# Altium PCB ALU_AND.PcbDoc
Units mil, origin at the board's own origin, x right, y up, seen from the top; angles counter-clockwise.
Board outline 3500 x 2500 mil, 2 copper layers (Top Layer, Bottom Layer); 9 components, 76 nets, 168 pads, 0 vias.
Unrouted connection lines stored in the file: 84.
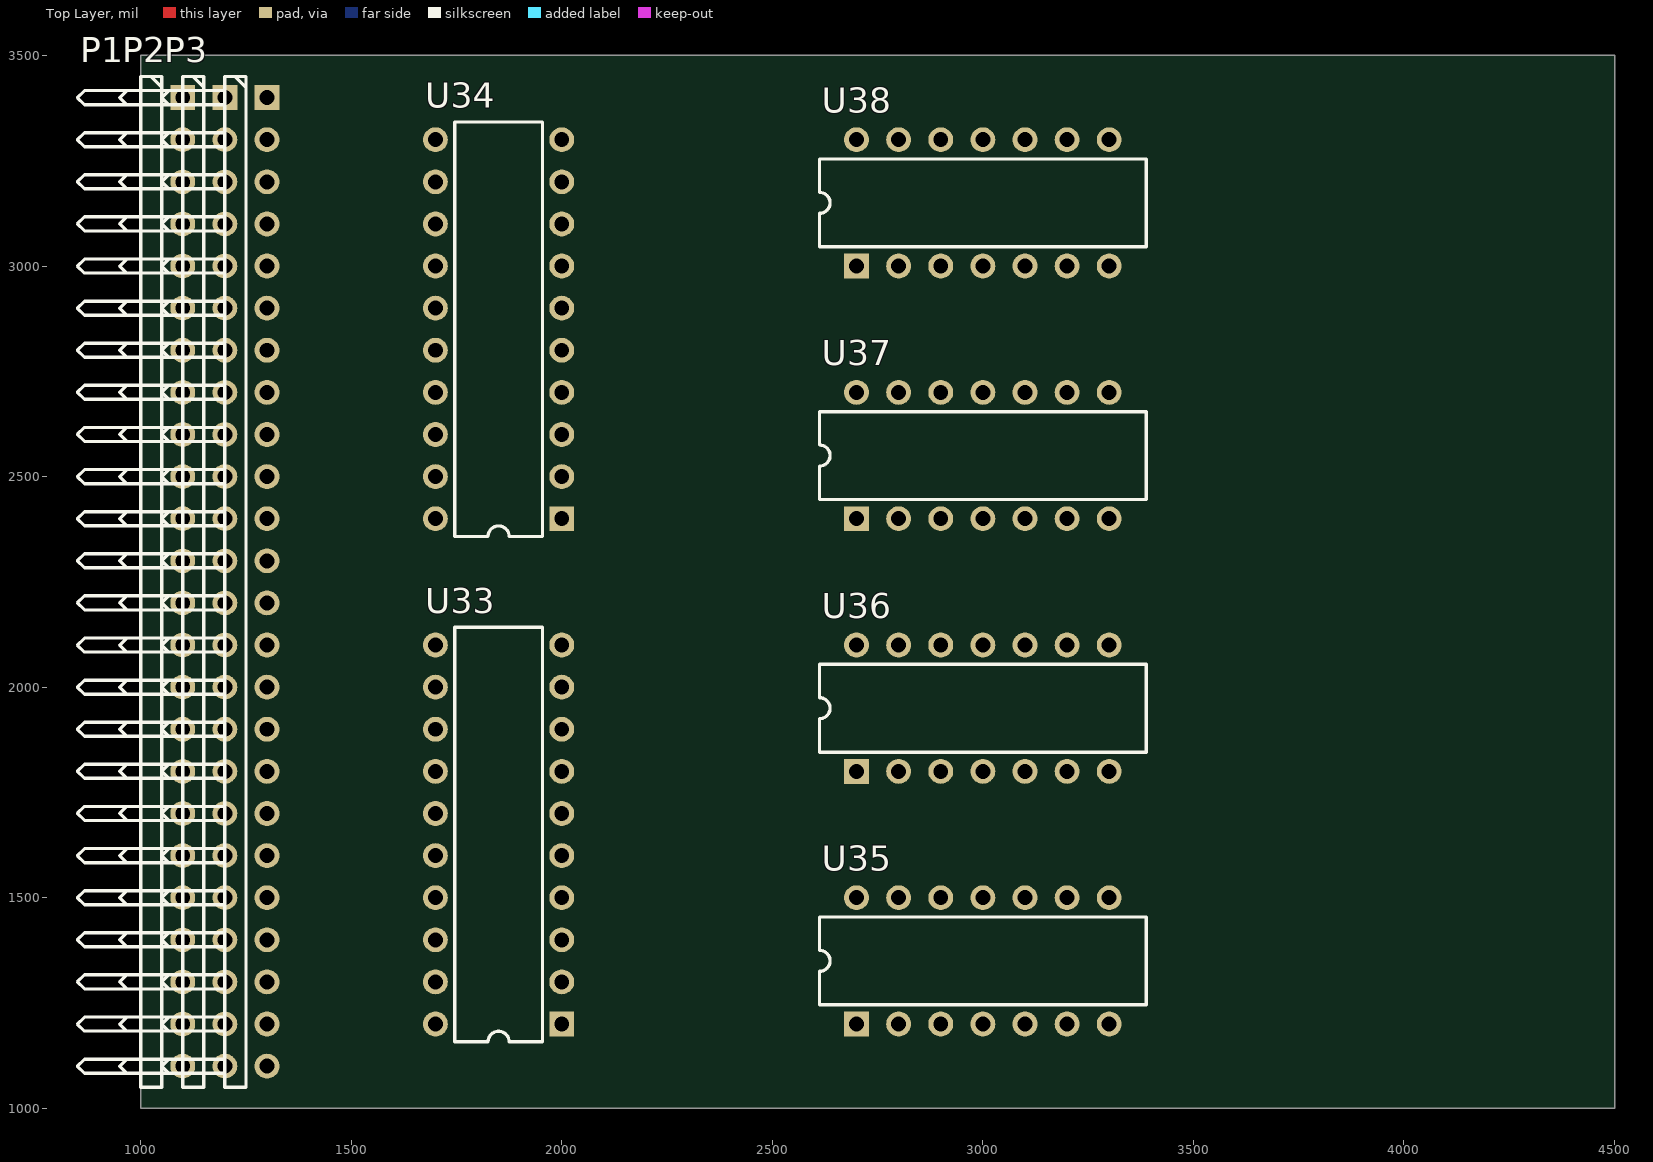
[diagram p0: Top Layer view]
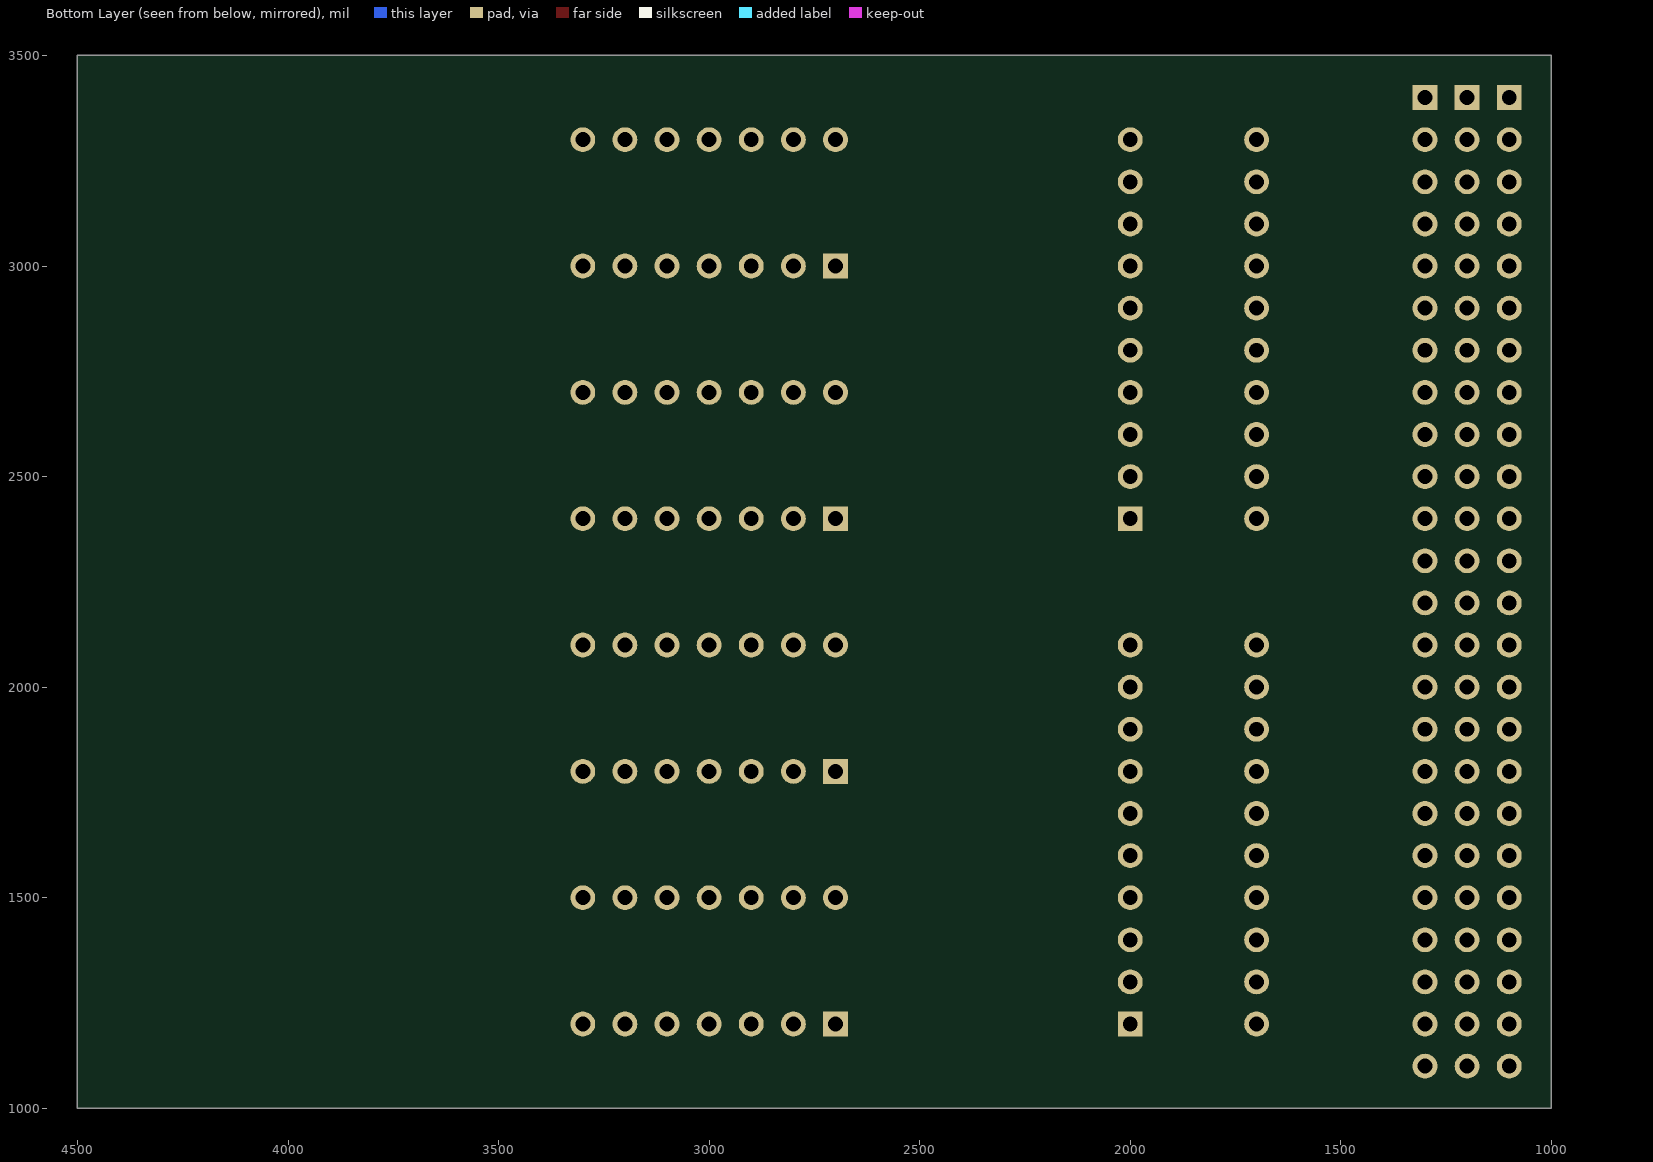
[diagram p1: Bottom Layer view, seen from below]

## Layer stack, top to bottom
Top Solder: solder mask 0.4, Solder Resist, Dk 3.5
Top Layer: signal copper 1.4
Dielectric 1: dielectric 12.6, FR-4, Dk 4.8
Bottom Layer: signal copper 1.4
Bottom Solder: solder mask 0.4, Solder Resist, Dk 3.5

## Board outline
1000,1000 4500,1000 4500,3500 1000,3500

## Design rules (kind name [scope] priority, off if disabled: settings)
Clearance [All] p1: gap=10 ignorepadtopadclearanceinfootprint=FALSE except(0: Arc-Hole Track-Hole SMDPad-Hole THPad-Hole Via-Hole Fill-Hole Poly-Hole Region-Hole Text-Hole)
PolygonConnect [All] p1: connectstyle=Relief reliefconductorwidth=10 reliefentries=4 polygonreliefangle="90 Angle" airgapwidth=10
RoutingVias [All] p1: holewidth=28 width=50 viastyle="Through Hole" minholewidth=28 minwidth=50 maxholewidth=28 maxwidth=50
SolderMaskExpansion [All] p1: expansion=4 istentingtop=FALSE
Width [All] p1: maxlimit=10 minlimit=10 preferedwidth=10
30 further rules are at their usual default settings.

## Classes and differential pairs
component class Connectors: P1 P2 P3
net class OUT_[15..0]: OUT_0 OUT_1 OUT_2 OUT_3 OUT_4 OUT_5 OUT_6 OUT_7 OUT_8 OUT_9 OUT_10 OUT_11 OUT_12 OUT_13 OUT_14 OUT_15
net class B_[15..0]: B_0 B_1 B_2 B_3 B_4 B_5 B_6 B_7 B_8 B_9 B_10 B_11 B_12 B_13 B_14 B_15
net class A_[15..0]: A_0 A_1 A_2 A_3 A_4 A_5 A_6 A_7 A_8 A_9 A_10 A_11 A_12 A_13 A_14 A_15
component class ALU_Adder: U33 U34 U35 U36 U37 U38

## Components (designator, comment, footprint, x,y, rotation, side; value= is the part's Value field where it differs from the comment)
P1 "Header 24H" HDR1X24H 1100,3400 r270 top
P2 "Header 24H" HDR1X24H 1200,3400 r270 top
P3 "Header 24H" HDR1X24H 1300,3400 r270 top
U33 "SN74LS245N" N020 1850,1650 r90 top
U34 "SN74LS245N" N020 1850,2850 r90 top
U35 "SN74LS08N" N014 3000,1350 r0 top
U36 "SN74LS08N" N014 3000,1950 r0 top
U37 "SN74LS08N" N014 3000,2550 r0 top
U38 "SN74LS08N" N014 3000,3150 r0 top

## Footprints (in the part's own frame and the unit in brackets; to place one, negate y for a bottom-side part, rotate by r counter-clockwise, add the part's x,y. Pads: shape width x height; smd on the part's side, far side on the other; paste and mask are expansions set on the pad)
HDR1X24H [mm] "Connector; Header; 24 Position; Right Angle"
  rect 1.5x1.5 hole 0.9: 1(0,0)
  round 1.5 hole 0.9: 2(2.54,0) 3(5.08,0) 4(7.62,0) 5(10.16,0) 6(12.7,0) 7(15.24,0) 8(17.78,0) 9(20.32,0) 10(22.86,0) 11(25.4,0) 12(27.94,0) 13(30.48,0) 14(33.02,0) 15(35.56,0) 16(38.1,0) 17(40.64,0) 18(43.18,0) 19(45.72,0) 20(48.26,0) 21(50.8,0) 22(53.34,0) 23(55.88,0) 24(58.42,0)
  silkscreen extent -1.27,-6.35 59.69,-1.27
N014 [mm] "DIP; 14 Leads; Row Spacing 7.62 mm; Pitch 2.54 mm"
  rect 1.5x1.5 hole 0.9: 1(-7.62,-3.81)
  round 1.5 hole 0.9: 2(-5.08,-3.81) 3(-2.54,-3.81) 4(0,-3.81) 5(2.54,-3.81) 6(5.08,-3.81) 7(7.62,-3.81) 8(7.62,3.81) 9(5.08,3.81) 10(2.54,3.81) 11(0,3.81) 12(-2.54,3.81) 13(-5.08,3.81) 14(-7.62,3.81)
  silkscreen extent -9.85,-2.65 9.85,2.65, body extent -9.15,-5.08 9.15,5.12, height 7.88
N020 [mm] "DIP; 20 Leads; Row Spacing 7.62 mm; Pitch 2.54 mm"
  rect 1.5x1.5 hole 0.9: 1(-11.43,-3.81)
  round 1.5 hole 0.9: 2(-8.89,-3.81) 3(-6.35,-3.81) 4(-3.81,-3.81) 5(-1.27,-3.81) 6(1.27,-3.81) 7(3.81,-3.81) 8(6.35,-3.81) 9(8.89,-3.81) 10(11.43,-3.81) 11(11.43,3.81) 12(8.89,3.81) 13(6.35,3.81) 14(3.81,3.81) 15(1.27,3.81) 16(-1.27,3.81) 17(-3.81,3.81) 18(-6.35,3.81) 19(-8.89,3.81) 20(-11.43,3.81)
  silkscreen extent -12.5,-2.65 12.5,2.65, body extent -13.08,-5.08 13.08,5.12, height 7.88

## Part data
P1 P2 P3: "Header, 24-Pin, Right Angle", LatestRevisionDate=17-Jul-2002, LatestRevisionNote="Re-released for DXP Platform.", Publisher="Altium Limited"
U33 U34: "Octal Bus Transceiver with 3-State Outputs", ComponentLink1Description="Manufacturer Link", ComponentLink1URL=http://www.ti.com/, ComponentLink2Description=Datasheet, ComponentLink2URL=http://www-s.ti.com/sc/ds/sn74ls245.pdf, DatasheetVersion=Mar-1988, LatestRevisionDate=04-Mar-2005, LatestRevisionNote="Stylized 3D Model Added.", PackageDescription="DIP; 20 Leads; Row Spacing 7.62 mm; Pitch 2.54 mm", PackageReference=N020, PackageVersion=Oct-1995, Published=8-Jun-2000, Publisher="Altium Limited"
U35 U36 U37 U38: "Quadruple 2-Input Positive-AND Gate", ComponentLink1Description="Manufacturer Link", ComponentLink1URL=http://www.ti.com/, ComponentLink2Description=Datasheet, ComponentLink2URL=http://www-s.ti.com/sc/ds/SN74LS08.pdf, DatasheetVersion=Mar-1988, LatestRevisionDate=04-Mar-2005, LatestRevisionNote="Stylized 3D Model Added.", PackageDescription="DIP; 14 Leads; Row Spacing 7.62 mm; Pitch 2.54 mm", PackageReference=N014, PackageVersion=Oct-1995, Published=8-Jun-2000, Publisher="Altium Limited"

## Nets (pads, with @x,y where several pads share a name; then routed paths per layer and width w, separated by ;. In a path a pad name is that pad's centre, name@x,y a point inside that pad or via, vN(x,y) a via of type N, cw(c..) or ccw(c..) an arc to the next point about the centre after c; other vN are vias at no path point)
A\D\D\_\O\U\T\: P1.2
A\N\D\_\O\U\T\: P1.4 U33.19 U34.19
A_0: P1.23 U35.1
A_1: P1.22 U35.4
A_2: P1.21 U35.9
A_3: P1.20 U35.12
A_4: P1.19 U36.1
A_5: P1.18 U36.4
A_6: P1.17 U36.9
A_7: P1.16 U36.12
A_8: P1.15 U37.1
A_9: P1.14 U37.4
A_10: P1.13 U37.9
A_11: P1.12 U37.12
A_12: P1.11 U38.1
A_13: P1.10 U38.4
A_14: P1.9 U38.9
A_15: P1.8 U38.12
B_0: P2.23 U35.2
B_1: P2.22 U35.5
B_2: P2.21 U35.10
B_3: P2.20 U35.13
B_4: P2.19 U36.2
B_5: P2.18 U36.5
B_6: P2.17 U36.10
B_7: P2.16 U36.13
B_8: P2.15 U37.2
B_9: P2.14 U37.5
B_10: P2.13 U37.10
B_11: P2.12 U37.13
B_12: P2.11 U38.2
B_13: P2.10 U38.5
B_14: P2.9 U38.10
B_15: P2.8 U38.13
CO: P3.2
GND: P1.24 P2.24 P3.24 U33.10 U34.10 U35.7 U36.7 U37.7 U38.7
LEFT: P2.2
O\R\_\O\U\T\: P1.5
OUT_0: P3.23 U33.18
OUT_1: P3.22 U33.17
OUT_2: P3.21 U33.16
OUT_3: P3.20 U33.15
OUT_4: P3.19 U33.14
OUT_5: P3.18 U33.13
OUT_6: P3.17 U33.12
OUT_7: P3.16 U33.11
OUT_8: P3.15 U34.18
OUT_9: P3.14 U34.17
OUT_10: P3.13 U34.16
OUT_11: P3.12 U34.15
OUT_12: P3.11 U34.14
OUT_13: P3.10 U34.13
OUT_14: P3.9 U34.12
OUT_15: P3.8 U34.11
REG_0: U33.2 U35.3
REG_1: U33.3 U35.6
REG_2: U33.4 U35.8
REG_3: U33.5 U35.11
REG_4: U33.6 U36.3
REG_5: U33.7 U36.6
REG_6: U33.8 U36.8
REG_7: U33.9 U36.11
REG_8: U34.2 U37.3
REG_9: U34.3 U37.6
REG_10: U34.4 U37.8
REG_11: U34.5 U37.11
REG_12: U34.6 U38.3
REG_13: U34.7 U38.6
REG_14: U34.8 U38.8
REG_15: U34.9 U38.11
RIGHT: P2.3
S\H\I\F\T\_\O\U\T\: P1.7
SUB: P1.3
VCC: P1.1 P2.1 P3.1 U33.1 U33.20 U34.1 U34.20 U35.14 U36.14 U37.14 U38.14
X\O\R\_\O\U\T\: P1.6
Z\F\: P3.3
pads on no net: P2.4 P2.5 P2.6 P2.7 P3.4 P3.5 P3.6 P3.7